# EAGLE board flight_computer (EAGLE 9.6.2)
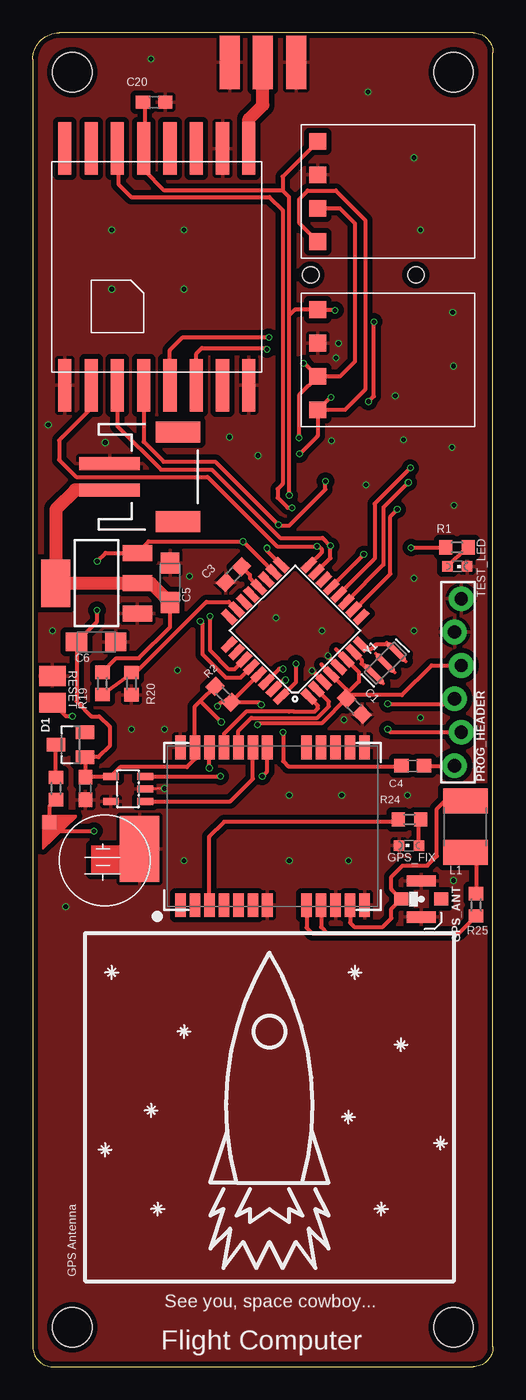
[diagram p0: board, top side]
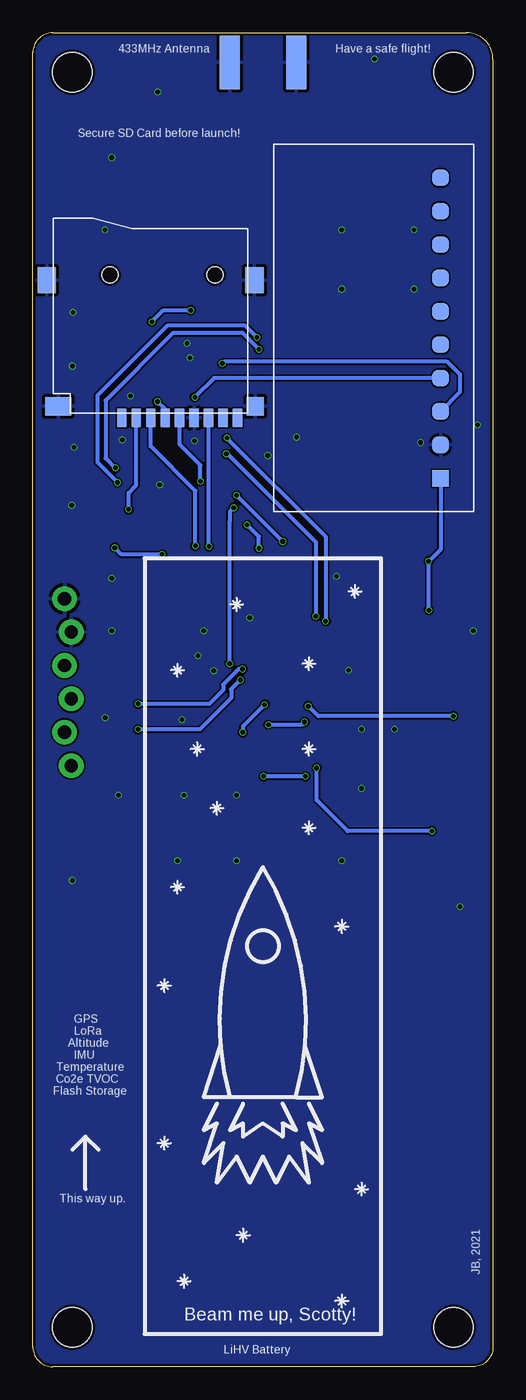
[diagram p1: board, bottom side, seen from below]

Size 35 x 101.5 mm. Coordinates in mm from the lower left corner, seen from the top.
Outline: 1.5,0 33.5,0 arc90 35,1.5 35,100 arc90 33.5,101.5 2,101.5 arc90 0,99.5 0,1.5 arc90 1.5,0
Copper layers (1*16): Top 0.035mm / dielectric 1.6mm / Bottom 0.035mm
Design rules "jlcpcb-2layers": minimum track width 5mil, minimum drill 0.3mm, track to track 5mil, track to pad 5mil, pad to pad 5mil, via to via 5mil, smd to smd 5mil, copper to edge 0.2mm, drill to drill 6mil, minimum pad ring 10mil, minimum via ring 3mil, stop-mask expansion 4mil, vias tented up to drill 0mil, thermal gap 10mil
Net classes: 1 vcc: width 0.203 mm
Holes 3 mm at 3,3 32,3 3,98.5 32,98.5

## Footprints (pad centres in the part's own frame; a part is rotated, then mirrored left to right if it is on the bottom)
C0603 = smd 1.1 x 1: 1 -0.85,0; 2 0.85,0
SMC_A = smd 1.6 x 1.4: + -1.5,0; - 1.5,0
SOT23 = smd 1 x 1.4: 1 -0.95,-1.1; 2 0.95,-1.1; 3 0,1.1
U.FL = smd 2.2 x 0.85: 1 0,1.375; 2 0,-1.375 | smd 1.05 x 1: FEED 1.525,0; NC -1.525,0
CHIPLED_0603 = smd 0.8 x 0.8: A 0,-0.75; C 0,0.75
JST-2-SMD = smd 1 x 4.6: 1 -1,-3.7; 2 1,-3.7 | smd 1.6 x 3.4: NC1 -3.4,1.5; NC2 3.4,1.5
L1812 = smd 1.9 x 3.4: 1 -1.95,0; 2 1.95,0
SMA-EDGE = smd 1.524 x 4.064: GND@0 0,0; GND@1 5.08,0; SIG 2.54,0 | smd 1.524 x 4.064 bottom: GND@2 0,0; GND@3 5.08,0
1X06_FEMALE_LOCK.010 = drill 1.016 pad 1.88: 1 0,0.254; 2 2.54,-0.254; 3 5.08,0.254; 4 7.62,-0.254; 5 10.16,0.254; 6 12.7,-0.254
R0603 = smd 1 x 1.1: 1 -0.85,0; 2 0.85,0
TF-PULL = smd 0.7 x 1.4: 1 -2.2,-7.62; 2 -1.1,-7.62; 3 0,-7.62; 4 1.1,-7.62; 5 2.2,-7.62; 6 3.3,-7.62; 7 4.4,-7.62; 8 5.5,-7.62; 9 6.6,-7.62 | smd 1.4 x 2: S1 -7.9,2.85; S2 7.9,2.85 | smd 1.28 x 1.4: S3 7.96,-6.75 | smd 1.95 x 1.4: S4 -7.025,-6.75 | hole 1.25: -3.1,3.25; 4.9,3.25
TQFP32-08 = smd 1.27 x 0.559: 1 -4.293,2.8; 2 -4.293,2; 3 -4.293,1.2; 4 -4.293,0.4; 5 -4.293,-0.4; 6 -4.293,-1.2; 7 -4.293,-2; 8 -4.293,-2.8; 17 4.293,-2.8; 18 4.293,-2; 19 4.293,-1.2; 20 4.293,-0.4; 21 4.293,0.4; 22 4.293,1.2; 23 4.293,2; 24 4.293,2.8 | smd 0.559 x 1.27: 9 -2.8,-4.293; 10 -2,-4.293; 11 -1.2,-4.293; 12 -0.4,-4.293; 13 0.4,-4.293; 14 1.2,-4.293; 15 2,-4.293; 16 2.8,-4.293; 25 2.8,4.293; 26 2,4.293; 27 1.2,4.293; 28 0.4,4.293; 29 -0.4,4.293; 30 -1.2,4.293; 31 -2,4.293; 32 -2.8,4.293
SOT223 = smd 1.219 x 2.235: 1 -2.311,-3.099; 2 0,-3.099; 3 2.311,-3.099 | smd 3.6 x 2.2: 4 0,3.099
SMD_JUMPER = smd 1.5 x 2: P$1 0,0; P$2 2.032,0
MPU9250_BB = smd 1.27 x 1.27: P$1 0,0; P$2 0,-2.54; P$3 0,-5.08; P$4 0,-7.62; P$5 0,-10.16; P$6 0,-12.7; P$7 0,-15.24; P$8 0,-17.78; P$9 0,-20.32; P$10 0,-22.86
RFM96W = smd 4 x 1: P$1 -1,15; P$2 -1,13; P$3 -1,11; P$4 -1,9; P$5 -1,7; P$6 -1,5; P$7 -1,3; P$8 -1,1; P$9 17,1; P$10 17,3; P$11 17,5; P$12 17,7; P$13 17,9; P$14 17,11; P$15 17,13; P$16 17,15
SOT23-5L = smd 0.55 x 1.2: 1 -0.95,-1.3; 2 0,-1.3; 3 0.95,-1.3; 4 0.95,1.3; 5 -0.95,1.3
TINY_SMD_CELL = smd 3 x 5: P$1 1.524,2.54 | smd 1 x 1: P$2 8.382,0.508
NEO-M9N/M8T/M8U = smd 1.8 x 0.8: 1 6,-7; 2 6,-5.9; 3 6,-4.8; 4 6,-3.7; 5 6,-2.6; 6 6,-1.5; 7 6,-0.4; 8 6,2.6; 9 6,3.7; 10 6,4.8; 11 6,5.9; 12 6,7; 13 -6,7; 14 -6,5.9; 15 -6,4.8; 16 -6,3.7; 17 -6,2.6; 18 -6,-0.4; 19 -6,-1.5; 20 -6,-2.6; 21 -6,-3.7; 22 -6,-4.8; 23 -6,-5.9; 24 -6,-7
BME280_BREAKOUT = smd 1.27 x 1.27: P$1 0,3.81; P$2 0,1.27; P$3 0,-1.27; P$4 0,-3.81
RESONATOR-SMD-3.2X1.3 = smd 0.45 x 1.905: 1 -1.2,0; 2 0,0; 3 1.2,0

## Placement (x,y rotation side)
C1  100n  [C0603]  24.45,50.23 135 top
C3  100n  [C0603]  15.27,60.28 45 top
C4  100n  [C0603]  28.89,45.73 180 top
C5  10u  [SMC_A]  10.44,59.66 90 top
C6  10u  [SMC_A]  4.82,55.15 0 top
C20  100n  [C0603]  9.22,96.23 180 top
C25  100n  [C0603]  4,43.99 90 top
D1  1A/40V/500mV  [SOT23]  2.86,47.33 90 top
GPS_ANT  U.FL  [U.FL]  29.54,35.58 180 top
GPS_FIX  [CHIPLED_0603]  28.62,39.66 90 top
J1  [JST-2-SMD]  9.53,67.71 270 top
L1  27u  [L1812]  32.9,41.09 270 top
LORA_ANT  SMA_EDGE  [SMA-EDGE]  14.96,99.26 0 top
PROG_HEADER  [1X06_FEMALE_LOCK.010]  32.33,45.74 90 top
R1  200  [R0603]  32.27,62.34 0 top
R2  10k  [R0603]  14.47,51.16 135 top
R19  10k  [R0603]  5.28,51.99 90 top
R20  10k  [R0603]  7.5,51.98 90 top
R23  1k  [R0603]  1.76,43.99 90 top
R24  1k  [R0603]  28.65,41.64 180 top
R25  22  [R0603]  33.72,35.14 270 top
SD  TF-HOLDER  [TF-PULL]  26.04,79.83 0 bottom
TEST_LED  [CHIPLED_0603]  32.29,60.89 270 top
U1  ATMEGA328P_TQFP  [TQFP32-08]  19.95,56 135 top
U3  [SOT223]  4.85,59.62 90 top
U$1  SMD_JUMPER  [SMD_JUMPER]  1.49,52.56 270 top
U$2  MPU9250_BB  [MPU9250_BB]  3.99,67.61 180 bottom
U$3  RFM96W  [RFM96W]  17.43,75.69 90 top
U$4  24AA32A  [SOT23-5L]  7.24,43.97 90 top
U$5  TINY_CELL_GPS  [TINY_SMD_CELL]  9.65,41.94 180 top
U$6  NEO-6M_GPS  [NEO-M9N/M8T/M8U]  18.23,41.12 270 top
U$7  BME280  [BME280_BREAKOUT]  21.67,89.42 0 top
U$8  SGP30_BREAKOUT  [BME280_BREAKOUT]  21.67,76.62 0 top
Y1  8MHz  [RESONATOR-SMD-3.2X1.3]  26.8,53.54 45 top

## Library data of the parts
C1 C3-C6 C20 C25 = rcl; SPICEPREFIX: C
D1 = diode
GPS_ANT = SparkFun-Connectors; PROD_ID: CONN-09193; SF_ID: WRL-09144
GPS_FIX TEST_LED = led
J1 = SparkFun-Connectors; PROD_ID: CONN-08352
L1 = rcl; SPICEPREFIX: L
LORA_ANT = SparkFun-Retired
PROG_HEADER = SparkFun-Connectors
R1 R2 R19 R20 R23-R25 = rcl; SPICEPREFIX: R
SD = sd-mmc
U1 = SparkFun-IC-Microcontroller; PROD_ID: IC-09069
U3 = SparkFun-IC-Power; PROD_ID: VREG-08170
U$1-U$8 = Josh's_Lib
Y1 = SparkFun-Clocks; PROD_ID: XTAL-08895

## Nets
0: C1.1 C3.1 C5.- C6.- C20.1 C25.1 GPS_ANT.1 GPS_ANT.2 GPS_FIX.C J1.1 LORA_ANT.GND@0 LORA_ANT.GND@1 LORA_ANT.GND@2 LORA_ANT.GND@3 PROG_HEADER.5 PROG_HEADER.6 R20.1 SD.6 SD.S1 SD.S2 SD.S3 SD.S4 TEST_LED.C U1.3 U1.5 U1.21 U3.1 U$1.P$1 U$2.P$2 U$3.P$1 U$3.P$8 U$3.P$10 U$4.2 U$4.5 U$5.P$1 U$6.7 U$6.10 U$6.12 U$6.13 U$6.24 U$7.P$2 U$8.P$2 Y1.2
3V3: C1.2 C6.+ C20.2 C25.2 D1.1 PROG_HEADER.4 R2.2 SD.4 U1.4 U1.6 U1.18 U3.3 U$2.P$1 U$3.P$13 U$4.4 U$6.23 U$7.P$1 U$8.P$1
BAT_MEAS: R19.1 R20.2 U1.23
CS_RFM96W: U1.11 U$3.P$5
CS_SD: SD.2 U1.10
DTR: C4.1 PROG_HEADER.1
MISO: SD.7 U1.16 U$3.P$2
MOSI: SD.3 U1.15 U$3.P$3
N$1: U1.7 Y1.1
N$2: U1.8 Y1.3
N$3: R1.1 U1.13
N$4: R1.2 TEST_LED.A
N$5: C4.2 R2.1 U1.29 U$1.P$2
N$10: C3.2 U1.20
N$30: LORA_ANT.SIG U$3.P$9
N$31: R23.1 U$5.P$2 U$6.22
N$32: D1.3 R23.2
N$42: R24.2 U$6.3
N$43: GPS_FIX.A R24.1
N$46: R25.2 U$6.8 U$6.9
N$47: GPS_ANT.FEED L1.1 U$6.11
N$48: L1.2 R25.1
RFM96W_INT: U1.32 U$3.P$14
RFM96W_RST: U1.12 U$3.P$6
RX: PROG_HEADER.3 U1.30
RX_GPS: U1.1 U$6.21
SCK: SD.5 U1.17 U$3.P$4
SCL: U1.28 U$2.P$3 U$7.P$3 U$8.P$3
SCL2: U$4.1 U$6.19
SDA: U1.27 U$2.P$4 U$7.P$4 U$8.P$4
SDA2: U$4.3 U$6.18
TX: PROG_HEADER.2 U1.31
TX_GPS: U1.2 U$6.20
VCC_FC: C5.+ J1.2 R19.2 U3.2 U3.4

## Tracks (layer width: path | path; a pad name or v marks a point on that pad's centre or on a via)
0  (via drill 0.35)
  Top 0.2: U$4.2 8.54,44 v10,44
  Top 0.3: U1.5 22.45,54.07 v22.45,54.09 | U1.3 22.09,52.12 v21.24,52.97
  other vias: 10,48.5 7.5,48.5 19.5,43.5 23.5,43.5 28.5,43.5 24,38.5 19.5,38.5 11.5,38.5 2.5,35 32,37 18.5,57 22,56 29,56 29,60 11.91,60.13 1.17,71.68 5.51,70.32 14.95,70.74 17.13,69.33 22.71,70.44 25.35,67.12 28.2,70.53 32.04,65.55 31.88,69.96 32,76.14 31.94,80.23 6,86.5 6,82 11.5,86.5 11.5,82 29.5,86.5 29,92 25.5,97 9,99.5 11,53 1.5,56 29.49,49.39 23.66,49.24 23.26,77.87 23.06,76.77 27.57,73.88
  pour Top (isolate 0.4): -0.5,-0.5 -0.5,102 14,102 35.5,102 35.5,97.5 35.5,-0.5 1.5,-0.5
  pour Bottom: -0.5,-1 36,-1 36,0 36,102.5 24,102.5 -1,102.5 -1,99.5 -1,-1
3V3  (via drill 0.35)
  Top 0.3: 23.85,51.17 23.85,51.54 U1.4 21.95,53.43 | 23.85,51.17 C1.2 | U1.18 v15.99,62.79 8.81,62.79 U3.3 5.53,61.93 v4.9,61.3 | v4.88,57.57 4.88,56.71 C6.+ 3.32,50.63 4.46,49.49 5.05,49.49 5.83,48.71 5.83,47.22 4.99,46.38 D1.1 4,46.34 C25.2 4.08,44.92 U$4.4 6.65,45.63 11.72,45.63 12.33,46.24 U$6.23 12.33,50.22 12.75,50.64 | R2.2 12.75,50.64 | 23.07,54.58 U1.6 24.8,52.85 24.8,52.12 23.85,51.17 | C1.2 24.12,51.1 28.07,51.1 30.33,53.36 PROG_HEADER.4 | C1.2 21.97,48.95 17.18,48.95 v17.08,48.85 | v14.33,49.06 12.75,50.64 | C20.2 8.5,96.1 8.5,92.76 | 8.5,92.76 U$3.P$13 | 19,89.5 19.5,89 19.5,80 | 8.5,92.76 8.5,91 10,89.5 19,89.5 | v19.5,66.3 19.5,80 | U$7.P$1 19,90.56 19,89.5 | 19.5,80 19.93,80.43 U$8.P$1 21.71,80.39 v22.99,80.39 | v25.53,73.44 25.94,73.85 v25.94,79.52
  Bottom 0.3: v4.88,57.57 4.88,61.28 | 4.88,61.28 v4.9,61.3 | v17.08,48.85 14.54,48.85 v14.33,49.06 | U$2.P$1 3.99,62.17 4.88,61.28 | v15.99,62.79 v19.5,66.3 | SD.4 24.94,72.85 v25.53,73.44 | v25.94,79.52 25.07,80.39 v22.99,80.39
BAT_MEAS
  Top 0.3: R19.1 7.24,52.56 R20.2 7.83,52.83 13.2,58.2 14.91,58.2 U1.23
CS_RFM96W  (via drill 0.35)
  Top 0.3: U$3.P$5 10.43,77.35 11.41,78.33 v17.95,78.33 | v28.56,67.28 26.67,65.39 26.67,61.02 U1.11
  Bottom 0.3: v17.95,78.33 18.83,79.21 24.79,79.21 30.1,73.9 30.1,68.82 v28.56,67.28
CS_SD  (via drill 0.35)
  Top 0.3: U1.10 24.48,57.62 27.19,60.33 27.19,64.7 v27.72,65.23
  Bottom 0.3: v27.72,65.23 27.72,66.49 27.14,67.07 SD.2
DTR
  Top 0.3: C4.1 32.06,45.72 PROG_HEADER.1
MISO  (via drill 0.35)
  Top 0.3: U$3.P$2 4.43,72.93 2,70.5 2,69 3.3,67.7 13.3,67.7 18.58,62.42 v21.6,62.42 21.75,62.42 21.96,62.21 21.96,61.97 U1.16
  Bottom 0.3: SD.7 21.64,62.46 v21.6,62.42
MOSI  (via drill 0.35)
  Top 0.3: U$3.P$3 6.43,71.57 9.75,68.25 13.61,68.25 18.8,63.06 22.04,63.06 v22.64,62.46 22.64,61.52 U1.15
  Bottom 0.3: v22.64,62.46 22.64,66.64 26.04,70.04 SD.3
N$1
  Top 0.3: U1.7 25,53.78 25,53.5 25.81,52.69 Y1.1
N$2
  Top 0.3: U1.8 25.29,54.62 25.76,54.62 26.13,54.99 27.05,54.99 Y1.3
N$3  (via drill 0.35)
  Top 0.3: U1.13 25.17,61.79 v25.17,61.81 | v28.77,62.32 28.79,62.34 R1.1
  Bottom 0.3: v25.17,61.81 27.5,61.81 28.26,61.81 v28.77,62.32
N$4
  Top 0.3: TEST_LED.A 32.99,62.34 R1.2
N$5  (via drill 0.35)
  Top 0.3: R2.1 U1.29 | R2.1 17.19,50.56 v17.37,50.38 | v19.03,48.27 19.03,46.09 19.43,45.69 28,45.69 C4.2 | U$1.P$2 2.52,49.5 v3,49.5 | v14.05,50.27 14.34,50.56 R2.1
  Bottom 0.3: v17.37,50.38 19.03,48.72 v19.03,48.27 | v3,49.5 13.28,49.5 v14.05,50.27
N$10
  Top 0.3: C3.2 16.5,60.25 16.5,60 17.18,59.32 U1.20
N$30
  Top 1: U$3.P$9 16.43,94.93 17.5,96 LORA_ANT.SIG 17.5,100
N$31  (via drill 0.35)
  Top 0.3: R23.1 1.27,42.65 U$5.P$2 1.94,40.76 v4.65,40.76 | v13.42,45.56 U$6.22
  Bottom 0.3: v4.65,40.76 11.06,40.76 13.42,43.12 v13.42,45.56
N$32
  Top 0.3: R23.2 D1.3
N$42
  Top 0.3: U$6.3 13.43,40.34 14.54,41.45 27.61,41.45 R24.2
N$43
  Top 0.3: GPS_FIX.A 29.37,41.51 R24.1
N$46
  Top 0.3: U$6.9 21.93,33.45 22.4,32.98 | 22.4,32.98 23.08,32.98 32.41,32.98 R25.2 | U$6.8 20.83,33.4 21.25,32.98 22.4,32.98
N$47
  Top 0.3: 24.16,35.15 U$6.11 24.13,33.78 24.44,33.47 26.62,33.47 27.27,34.12 27.27,34.84 GPS_ANT.FEED 27.27,36.33 27.27,37.28 28.13,38.14 30.02,38.14 30.73,38.85 30.73,42.45 31.32,43.04 L1.1
N$48
  Top 0.3: L1.2 33.72,38.32 R25.1
RFM96W_INT  (via drill 0.35)
  Top 0.3: U1.32 20.02,52.11 v20.02,53.5 | U$3.P$14 6.5,92.62 6.5,90 7.5,89 18,89 19,88 19,67.17 18.62,66.79 18.62,66.12 19.38,65.36 v19.72,65.36
  Bottom 0.3: v20.02,53.5 20.02,64.37 20.02,64.52 20.02,65.06 v19.72,65.36
RFM96W_RST  (via drill 0.35)
  Top 0.3: U$3.P$6 12.43,77.1 12.85,77.52 17.71,77.52 v17.81,77.42 | v28.72,68.39 26,65.67 26,61.48 U1.12
  Bottom 0.3: v17.81,77.42 19.05,78.66 24.34,78.66 29.47,73.53 29.47,69.14 v28.72,68.39
RX  (via drill 0.35)
  Top 0.3: U1.30 18.74,53.09 v19.04,53.09 | v27,50.44 31.69,50.44 PROG_HEADER.3
  Bottom 0.3: v19.04,53.09 19.33,53.09 20.52,51.9 20.52,51.49 21.57,50.44 v27,50.44
RX_GPS
  Top 0.3: U$6.21 14.53,48.16 16.22,49.85 19.5,49.85 19.87,49.85 21.43,49.85 21.68,50.1 21.68,50.31 U1.1
SCK  (via drill 0.35)
  Top 0.3: U$3.P$4 8.43,70.39 9.95,68.87 13.89,68.87 v18.7,64.06 18.76,64 19.5,64 22.26,66.76 v22.26,67.38 | U1.17 17.81,62.1 v17.81,62.29
  Bottom 0.3: v22.26,67.38 22.26,68.59 23.84,70.17 SD.5 | v17.81,62.29 17.81,63.17 v18.7,64.06
SCL  (via drill 0.35)
  Top 0.3: U1.28 15.79,52.41 14.71,52.41 12.92,54.2 12.92,56.53 v12.73,56.72 | U$7.P$3 23.35,88.15 24.5,87 24.5,76.5 23.35,75.35 U$8.P$3 | U$8.P$3 20.24,73.92 v20.24,70.67 | v20.59,76.34 20.68,76.34 U$8.P$3
  Bottom 0.3: v12.73,56.72 12.73,63.16 v20.24,70.67 | U$2.P$3 2.5,74.18 2.5,75.5 3.47,76.47 20.46,76.47 v20.59,76.34
SCL2
  Top 0.3: U$4.1 15.02,43.02 16.73,44.73 U$6.19
SDA  (via drill 0.35)
  Top 0.3: U1.27 15.32,53.07 14.91,53.07 13.5,54.48 13.5,57.09 v13.48,57.11 | U$7.P$4 20.28,87 20.28,88.86 20.91,89.49 23.05,89.49 25.28,87.26 25.28,74.35 23.74,72.81 U$8.P$4 21.67,72.77 | 21.67,72.77 21.67,70.83 v20.29,69.45 | v22.67,73.77 21.67,72.77
  Bottom 0.3: v20.29,69.45 20.18,69.45 13.48,62.75 v13.48,57.11 | U$2.P$4 21.22,75.23 22.56,73.89 22.56,73.88 v22.67,73.77
SDA2  (via drill 0.35)
  Top 0.3: U$4.3 v14.26,44.92 | v17.45,44.92 17.83,45.3 U$6.18
  Bottom 0.3: v14.26,44.92 v17.45,44.92
TX  (via drill 0.35)
  Top 0.3: U1.31 19.03,52.25 v19.21,52.25 | v27,48.5 27.22,48.28 PROG_HEADER.2
  Bottom 0.3: v19.21,52.25 19.91,51.55 19.91,50.88 22.29,48.5 v27,48.5
TX_GPS
  Top 0.3: U$6.20 15.63,48.39 16.62,49.38 21.64,49.38 22.51,50.25 22.51,50.61 U1.2
VCC_FC
  Top 0.3: R19.2 6.36,53.92 8.07,53.92 10.44,56.29 C5.+
  Top 1: J1.2 3.21,66.71 1.75,65.25 U3.4 U3.2 8.98,59.62 C5.+

## Text on the board
tPlace: RESET | GPS Antenna | See you, space cowboy... | Flight Computer
bPlace: Have a safe flight! | 433MHz Antenna | Secure SD Card before launch! | GPS / LoRa / Altitude / IMU / Temperature / Co2e TVOC / Flash Storage | This way up. | JB, 2021 | Beam me up, Scotty! | LiHV Battery